# EAGLE board tiny430-2 (EAGLE 6.3)
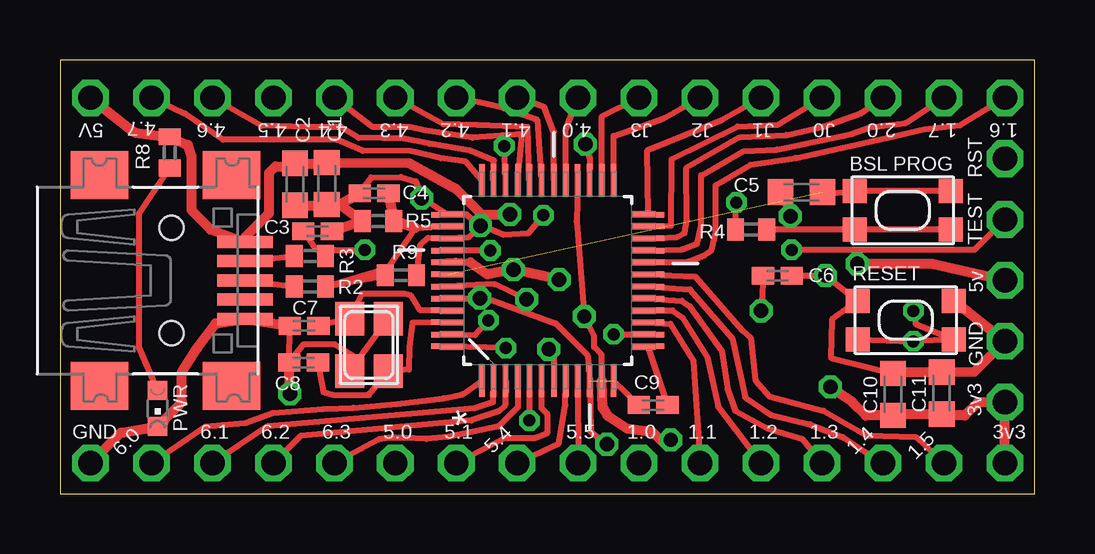
[diagram p0: board, top side]
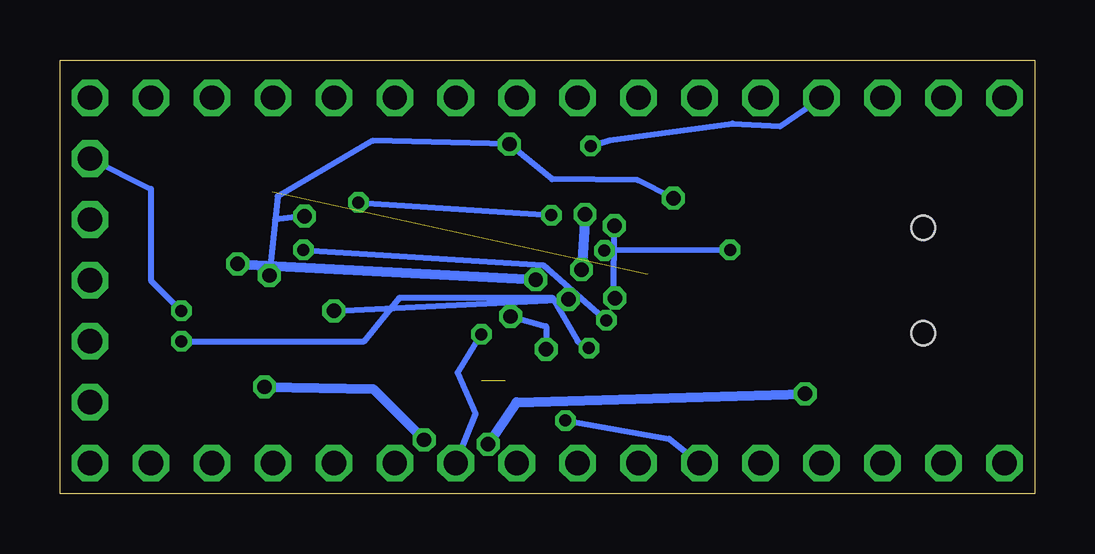
[diagram p1: board, bottom side, seen from below]

Size 40.62 x 18.09 mm. Coordinates in mm from the lower left corner, seen from the top.
Outline: 0,0 40.62,0 40.62,18.09 0,18.09 0,0
Copper layers (1*16): Top 0.0356mm / dielectric 1.5011mm / Bottom 0.0356mm
Design rules "LaenPCBOrder": minimum track width 6mil, minimum drill 13mil, track to track 6mil, track to pad 6mil, pad to pad 6mil, via to via 6mil, smd to smd 6mil, copper to edge 15mil, drill to drill 6mil, minimum pad ring 7mil, minimum via ring 7mil, stop-mask expansion 4mil, vias tented up to drill 0mil, thermal gap 10mil

## Footprints (pad centres in the part's own frame; a part is rotated, then mirrored left to right if it is on the bottom)
C0603K = smd 1.05 x 1.08: 1 -0.875,0; 2 0.875,0
C0402K = smd 0.925 x 0.74: 1 -0.6,0; 2 0.6,0
USB-MINIB = smd 0.5 x 2.308: D+ 0,4.064; D- -0.8,4.064; GND 1.6,4.064; ID 0.8,4.064; VBUS -1.6,4.064 | smd 2 x 2.4: GND1 -4.4,-2; GND2 -4.4,3.5; GND3 4.4,3.5; GND4 4.4,-2 | hole 1: -2.2,1; 2.2,1
1X01NS = drill 1.016 pad 1.422 octagon: 1 0,0
CHIPLED_0603 = smd 0.8 x 0.8: A 0,-0.75; C 0,0.75
NX3225 = smd 1.4 x 1.2: 1 -1.1,-0.8; 2 1.1,-0.8; 3 1.1,0.8; 4 -1.1,0.8
R0402 = smd 0.7 x 0.9: 1 -0.65,0; 2 0.65,0
KMR2 = smd 1 x 1: 1 2,0.8; 2 2,-0.8; 3 -2,0.8; 4 -2,-0.8
QFP50P900X900X160-48N = smd 1.321 x 0.229: 1 -4.191,2.743; 2 -4.191,2.261; 3 -4.191,1.753; 4 -4.191,1.245; 5 -4.191,0.762; 6 -4.191,0.254; 7 -4.191,-0.254; 8 -4.191,-0.762; 9 -4.191,-1.245; 10 -4.191,-1.753; 11 -4.191,-2.261; 12 -4.191,-2.743; 25 4.191,-2.743; 26 4.191,-2.261; 27 4.191,-1.753; 28 4.191,-1.245; 29 4.191,-0.762; 30 4.191,-0.254; 31 4.191,0.254; 32 4.191,0.762; 33 4.191,1.245; 34 4.191,1.753; 35 4.191,2.261; 36 4.191,2.743 | smd 0.229 x 1.321: 13 -2.743,-4.191; 14 -2.261,-4.191; 15 -1.753,-4.191; 16 -1.245,-4.191; 17 -0.762,-4.191; 18 -0.254,-4.191; 19 0.254,-4.191; 20 0.762,-4.191; 21 1.245,-4.191; 22 1.753,-4.191; 23 2.261,-4.191; 24 2.743,-4.191; 37 2.743,4.191; 38 2.261,4.191; 39 1.753,4.191; 40 1.245,4.191; 41 0.762,4.191; 42 0.254,4.191; 43 -0.254,4.191; 44 -0.762,4.191; 45 -1.245,4.191; 46 -1.753,4.191; 47 -2.261,4.191; 48 -2.743,4.191

## Placement (x,y rotation side)
C1  100nF  [C0603K]  11.11,12.93 90 top
C2  10uF  [C0603K]  9.79,12.9 90 top
C3  10pF  [C0402K]  10.74,10.94 0 top
C4  10pF  [C0402K]  13.09,12.53 180 top
C5  100nF  [C0603K]  30.89,12.57 180 top
C6  220nF  [C0402K]  29.89,9.09 180 top
C7  22pF  [C0402K]  10.17,6.99 180 top
C8  22pF  [C0402K]  10.15,5.47 180 top
C9  470nF  [C0402K]  24.72,3.7 0 top
C10  100nF  [C0603K]  34.71,4.13 90 top
C11  100nF  [C0603K]  36.73,4.19 90 top
CN1  [USB-MINIB]  3.65,8.89 270 top
JP1  M01SMDNS  [1X01NS]  1.27,16.51 0 top
JP2  GND  [1X01NS]  1.27,1.27 0 top
JP3  M01SMDNS  [1X01NS]  3.81,1.27 0 top
JP4  M01SMDNS  [1X01NS]  6.35,1.27 0 top
JP5  M01SMDNS  [1X01NS]  8.89,1.27 0 top
JP6  M01SMDNS  [1X01NS]  11.43,1.27 0 top
JP7  M01SMDNS  [1X01NS]  13.97,1.27 0 top
JP8  M01SMDNS  [1X01NS]  16.51,1.27 0 top
JP9  M01SMDNS  [1X01NS]  24.13,1.27 0 top
JP10  M01SMDNS  [1X01NS]  26.67,1.27 0 top
JP11  M01SMDNS  [1X01NS]  29.21,1.27 0 top
JP12  M01SMDNS  [1X01NS]  31.75,1.27 0 top
JP13  M01SMDNS  [1X01NS]  34.29,1.27 0 top
JP14  M01SMDNS  [1X01NS]  36.83,1.27 0 top
JP15  M01SMDNS  [1X01NS]  19.05,1.27 0 top
JP16  M01SMDNS  [1X01NS]  21.59,1.27 0 top
JP17  M01SMDNS  [1X01NS]  39.37,1.27 0 top
JP18  M01SMDNS  [1X01NS]  39.37,13.97 0 top
JP19  M01SMDNS  [1X01NS]  39.37,11.43 0 top
JP20  M01SMDNS  [1X01NS]  39.37,8.89 0 top
JP21  M01SMDNS  [1X01NS]  39.37,6.35 0 top
JP22  M01SMDNS  [1X01NS]  39.37,3.81 0 top
JP23  M01SMDNS  [1X01NS]  3.81,16.51 0 top
JP24  M01SMDNS  [1X01NS]  6.35,16.51 0 top
JP25  M01SMDNS  [1X01NS]  8.89,16.51 0 top
JP26  M01SMDNS  [1X01NS]  11.43,16.51 0 top
JP27  M01SMDNS  [1X01NS]  13.97,16.51 0 top
JP28  M01SMDNS  [1X01NS]  16.51,16.51 0 top
JP29  M01SMDNS  [1X01NS]  19.05,16.51 0 top
JP30  M01SMDNS  [1X01NS]  21.59,16.51 0 top
JP31  M01SMDNS  [1X01NS]  24.13,16.51 0 top
JP32  M01SMDNS  [1X01NS]  26.67,16.51 0 top
JP33  M01SMDNS  [1X01NS]  29.21,16.51 0 top
JP34  M01SMDNS  [1X01NS]  31.75,16.51 0 top
JP35  M01SMDNS  [1X01NS]  34.29,16.51 0 top
JP36  M01SMDNS  [1X01NS]  36.83,16.51 0 top
JP37  M01SMDNS  [1X01NS]  39.37,16.51 0 top
PWR  [CHIPLED_0603]  4.06,3.56 180 top
Q1  [NX3225]  12.87,6.2 90 top
R2  27R  [R0402]  10.41,8.64 180 top
R3  27R  [R0402]  10.41,9.91 180 top
R4  100R  [R0402]  28.8,11.01 0 top
R5  1M/1%  [R0402]  13.25,11.37 0 top
R8  330  [R0402]  4.57,14.22 270 top
R9  1.5k  [R0402]  14.2,9.1 0 top
SW1  BSL  [KMR2]  35.11,11.81 180 top
SW2  RESET  [KMR2]  35.24,7.23 0 top
U1  MSP430F5510IPT  [QFP50P900X900X160-48N]  20.32,8.89 90 top

## Library data of the parts
C1-C11 CN1 PWR Q1 R2-R5 R8 R9 SW1 SW2 = adafruit
JP1-JP37 = smartmocha
U1 = Texas Instruments_By_element14_Batch_1; MPN: MSP430F5510IPT; OC_FARNELL: 1866799; OC_NEWARK: 47T2199; PACKAGE: QFP-48; SUPPLIER: TEXAS INSTRUMENTS

## Nets
1.0: JP9.1 U1.14
1.1: JP10.1 U1.15
1.2: JP11.1 U1.16
1.3: JP12.1 U1.17
1.4: JP13.1 U1.18
1.5: JP14.1 U1.19
1.6: JP37.1 U1.20
1.7: JP36.1 U1.21
2.0: JP35.1 U1.22
4.0: JP30.1 U1.29
4.1: JP29.1 U1.30
4.2: JP28.1 U1.31
4.3: JP27.1 U1.32
4.4: JP26.1 U1.33
4.5: JP25.1 U1.34
4.6: JP24.1 U1.35
4.7: JP23.1 U1.36
5.0: JP7.1 U1.5
5.1: JP8.1 U1.6
5.4: JP15.1 U1.8
5.5: JP16.1 U1.9
6.0: JP3.1 U1.1
6.1: JP4.1 U1.2
6.2: JP5.1 U1.3
6.3: JP6.1 U1.4
+3V3: C10.1 C11.1 JP17.1 JP22.1 U1.7 U1.11 U1.28
+5V: C1.2 C2.2 CN1.VBUS JP1.1 JP20.1 R8.1 U1.41
GND: C1.1 C2.1 C3.2 C4.2 C5.2 C6.1 C7.2 C8.2 C9.1 C10.2 C11.2 CN1.GND JP2.1 JP21.1 PWR.C Q1.2 Q1.4 R5.1 SW2.1 SW2.3 U1.10 U1.12 U1.27 U1.37 U1.44
J0: JP34.1 U1.23
J1: JP33.1 U1.24
J2: JP32.1 U1.25
J3: JP31.1 U1.26
N$1: CN1.D+ R2.2
N$2: CN1.D- R3.2
N$3: C6.2 U1.43
N$4: PWR.A R8.2
N$5: R4.1 R9.2 U1.39
N$6: C5.1 SW1.2 SW1.4 U1.42
N$7: R4.2 SW1.1 SW1.3
N$8: C9.2 U1.13
N$9: C3.1 R3.1 U1.40
N$10: C4.1 R2.1 R5.2 R9.1 U1.38
N$11: C7.1 Q1.3 U1.45
N$12: C8.1 Q1.1 U1.46
RST: JP18.1 SW2.2 SW2.4 U1.48
TEST: JP19.1 U1.47

## Tracks (layer width: path | path; a pad name or v marks a point on that pad's centre or on a via)
1.0  (via drill 0.5 pad 0.25)
  Top 0.254: v23.07,6.64 U1.14
  Bottom 0.254: JP9.1 23.3,3.32 24.05,5.03 v23.07,6.64
1.1
  Top 0.254: U1.15 25.43,7.08 26.39,5.54 JP10.1
1.2
  Top 0.254: U1.16 25.52,7.64 25.94,7.33 26.98,5.68 27.43,3.62 JP11.1
1.3
  Top 0.254: U1.17 25.91,8.04 26.25,7.81 27.57,5.96 27.82,4.33 28.13,3.46 29.47,2.73 30.93,2.28 JP12.1
1.4
  Top 0.254: U1.18 26.25,8.52 28.01,6.46 28.55,4.02 29.61,3.29 31.24,2.9 32.63,2.35 JP13.1
1.5
  Top 0.254: U1.19 26.47,9.05 28.44,6.8 28.77,6.49 28.97,4.72 29.56,4.05 31.8,3.46 33.59,2.42 35.65,2.36 JP14.1
1.6
  Top 0.254: U1.20 26.14,9.67 26.83,9.93 27.16,10.16 27.32,10.89 27.32,12.87 28.78,13.71 30.66,13.99 34.48,14.84 36.01,15.19 37.49,15.36 JP37.1
1.7
  Top 0.254: U1.21 25.91,10.18 26.55,10.42 26.71,11.17 26.71,13.27 28.47,14.28 29.88,14.35 32.96,14.98 33.76,15.29 35.24,15.45 JP36.1
2.0
  Top 0.254: U1.22 25.72,10.7 26.03,10.87 26.12,11.38 26.1,13.59 28.31,14.86 30.28,14.96 31.81,15.31 33.38,15.88 JP35.1
4.0
  Top 0.254: U1.29 21.07,15.17 JP30.1
4.1
  Top 0.254: U1.30 20.58,15.08 20.18,16.11 JP29.1
4.2
  Top 0.254: U1.31 19.9,15.57 18.5,16.07 17.8,16.24 JP28.1
4.3
  Top 0.254: U1.32 19.49,15.29 17.38,15.37 15.97,15.4 JP27.1
4.4
  Top 0.254: U1.33 19.25,14.99 17.18,14.84 15.23,15.14 14.57,15.29 13.03,15.29 JP26.1
4.5  (via drill 0.5 pad 0.25)
  Top 0.254: U1.34 v18.51,14.5
  Bottom 0.254: v18.51,14.5 17.71,14.73 12.6,15.43 10.61,15.32 JP25.1
4.6
  Top 0.254: U1.35 18.08,13.89 17.07,14.3 15.39,14.59 14.32,14.81 12.44,14.84 11.71,15.29 10.33,15.29 8.39,15.35 JP24.1
4.7
  Top 0.254: U1.36 16.9,13.84 15.87,13.99 14.61,14.29 12.6,14.3 11.52,14.76 6.78,14.76 5.21,15.86 JP23.1
5.0  (via drill 0.5 pad 0.25)
  Top 0.254: U1.5 v19.56,3.05
  Bottom 0.254: v19.56,3.05 15.24,2.29 JP7.1
5.1
  Top 0.254: JP8.1 18.54,2.33 19.81,2.33 20.32,2.54 20.32,3.3 20.07,3.56 U1.6
5.4
  Top 0.254: JP15.1 20.77,2.08 21.05,3.68 U1.8
5.5
  Top 0.254: U1.9 JP16.1
6.0
  Top 0.254: JP3.1 6.06,2.8 7.73,2.94 8.86,3.36 10.97,3.53 12.24,3.58 14.05,3.74 15.97,3.98 16.77,4.14 U1.1
6.1
  Top 0.254: U1.2 18.03,3.81 17.27,3.56 8.64,2.79 JP4.1
6.2
  Top 0.254: U1.3 18.54,3.68 18.29,3.43 17.14,3.05 10.03,2.41 JP5.1
6.3
  Top 0.254: U1.4 19.07,3.6 18.28,2.8 16.8,2.49 16.18,2.38 15.27,2.28 14.33,2.33 13.72,2.33 13.27,2.26 JP6.1
+3V3  (via drill 0.6)
  Top 0.254: U1.28 21.52,11.35 v21.84,7.39 22.25,6.57 22.25,6.11 22.57,5.79 U1.11 | v20.36,6.02 20.57,6.02 U1.7
  Top 0.406: JP17.1 JP22.1 38.26,3.81 37.71,3.26 36.78,3.26 C11.1 34.76,3.31 C10.1 33.57,3.26 33.02,3.81 33.02,3.82 v32.1,4.45 | v25.45,2.24 25.01,2.24 24.69,2.56 23.64,2.7 22.83,3.23 22.73,3.42 22.62,3.54 U1.11
  Bottom 0.254: v21.84,7.39 20.36,6.98 v20.36,6.02
  Bottom 0.406: v32.1,4.45 27.57,4.36 v25.45,2.24
+5V  (via drill 0.6)
  Top 0.305: 17.1,9.64 16.48,9.67 U1.41
  Top 0.406: JP1.1 3.12,15.06 R8.1 5.33,14.54 5.47,14.09 5.47,11.83 6.27,11.01 CN1.VBUS 7.71,10.69 8.71,11.69 8.71,13.38 8.98,13.64 9.66,13.64 C2.2 11.08,13.77 C1.2 14.55,13.78 16.51,12.7 17.57,11.64 v18.75,11.64 | 17.1,9.64 17.8,9.15 18.42,9.27 v18.89,9.34 v20.8,8.92 | JP20.1 36.33,9.58 v33.22,9.58
  Bottom 0.406: v18.75,11.64 v18.89,9.34 | v33.22,9.58 v20.8,8.92
GND  (via drill 0.6)  (1 unrouted)
  Top 0.254: Q1.4 12.45,5.61 | 12.45,5.61 Q1.2 | C7.2 C8.2 10.16,6.23 11.43,6.23 12.45,5.61 | C9.1 U1.12 | 20.89,6.86 20.65,7.1 17.94,8.09 U1.44 v17.5,8.15 | 20.89,6.86 | 20.89,6.86 21.98,5.77 21.98,5.75 U1.10 22.11,2.58 v22.78,2.06 | U1.27 22.09,13.97 v21.89,14.57 | C4.2 12.96,13.19 14.2,13.21 14.83,13.02 v15.06,12.32 U1.37 16.94,11.64 v17.52,11.17 | C6.1 v31.89,9.09 SW2.3 32.16,7.26 32.12,5.67 C10.2 | C5.2 v30.43,11.57
  Top 0.406: JP2.1 2.54,2.54 PWR.C 5.08,3.81 5.08,5.08 5.71,6.04 6.48,7.1 CN1.GND C7.2 | SW2.1 JP21.1 38.1,5.08 C11.2 34.76,5.06 C10.2 | C2.1 11.08,12.02 C1.1 11.66,12.05 | 11.66,12.05 R5.1 C3.2 | 11.66,12.05 C4.2 | v9.57,4.16 C8.2
  Bottom 0.254: 31.66,11.42 31.56,12.39 27.58,14.72 v21.89,14.57 20.12,13.12 16.54,13.07 v15.06,12.32 | 31.66,11.42 v31.89,9.09 | v17.5,8.15 17.54,8.24 v17.52,11.17 | v30.43,11.57 31.66,11.42
  Bottom 0.406: v22.78,2.06 21.59,3.81 v9.57,4.16
J0
  Top 0.254: U1.23 25.46,11.17 25.49,13.95 28.24,15.31 29.9,15.38 JP34.1
J1
  Top 0.254: U1.24 24.48,14.32 27.55,15.57 JP33.1
J2
  Top 0.254: U1.25 23.07,14.91 25.18,15.66 JP32.1
J3
  Top 0.254: U1.26 22.57,15.73 JP31.1
N$1
  Top 0.254: CN1.D+ R2.2
N$2
  Top 0.254: CN1.D- R3.2
N$3  (via drill 0.6)
  Top 0.254: C6.2 v29.21,7.62 | v19.44,8.1 18.11,8.74 U1.43
  Bottom 0.254: v29.21,7.62 v19.44,8.1
N$4
  Top 0.254: PWR.A 3.3,6.1 3.3,11.68 R8.2
N$5  (via drill 0.5 pad 0.25)
  Top 0.254: R9.2 15.01,10.37 15.34,10.68 U1.39 17.01,10.68 17.29,10.93 17.91,11.03 18.49,10.79 19.51,10.85 v20.14,11.61 | R4.1 v28.18,12.14
  Bottom 0.254: v28.18,12.14 v20.14,11.61
N$6  (1 unrouted)
  Top 0.254: SW1.4 SW1.2 31.74,12.48 C5.1
N$7
  Top 0.254: SW1.3 SW1.1 R4.2
N$8
  Top 0.254: C9.2 U1.13
N$9  (via drill 0.5 pad 0.25)
  Top 0.254: v12.7,10.16 11.43,10.16 R3.1 10.62,10.24 C3.1 | v17.94,10.14 U1.40
  Bottom 0.254: v12.7,10.16 v17.94,10.14
N$10
  Top 0.254: U1.38 14.82,11.08 13.67,9.41 R2.1 R9.1
  Top 0.406: C4.1 R5.2 14.82,11.08
N$11
  Top 0.254: U1.45 15.01,7.64 14.63,8.26 14.35,8.33 12.57,8.33 Q1.3 C7.1
N$12
  Top 0.254: U1.46 14.68,7.12 14.56,6.12 14.54,5.17 Q1.1 12.87,4.12 11.39,4.12 10.97,4.23 C8.1
RST  (via drill 0.5 pad 0.25)
  Top 0.254: v35.56,7.62 35.65,7.08 SW2.2 v35.56,6.35 SW2.4 | v18.58,6.07 U1.48
  Bottom 0.254: JP18.1 36.83,12.7 36.83,8.89 v35.56,7.62 | v35.56,6.35 27.94,6.35 26.47,8.17 20.12,8.17 19.05,6.35 v18.58,6.07
TEST  (via drill 0.5 pad 0.25)
  Top 0.254: JP19.1 38.1,10.16 v30.48,10.16 | v17.85,7.22 17.29,6.61 U1.47
  Bottom 0.254: v30.48,10.16 20.49,9.53 v17.85,7.22

## Text on the board
tNames: 4.7 | 5V | 4.6 | 4.5 | 4.4 | 4.3 | 4.2 | 4.1 | 4.0 | J3 | J2 | J1 | J0 | 2.0 | 1.7 | 1.6 | BSL PROG | RST | TEST | RESET | 5v | GND | 3v3 | GND | 6.0 | 6.1 | 6.2 | 6.3 | 5.0 | 5.1 | 5.4 | 5.5 | 1.0 | 1.1 | 1.2 | 1.3 | 1.4 | 3v3 | 1.5